# Altium PCB Terminal_Board_PCB V4.PcbDoc (part 2 of 2)
Units mm, origin at the board's own origin, x right, y up, seen from the top; angles counter-clockwise.
Board outline 240.8 x 116.8 mm, 2 copper layers (Top Layer, Bottom Layer 1), stack 0.444 mm thick; 18 components, 37 nets, 96 pads, 39 vias.
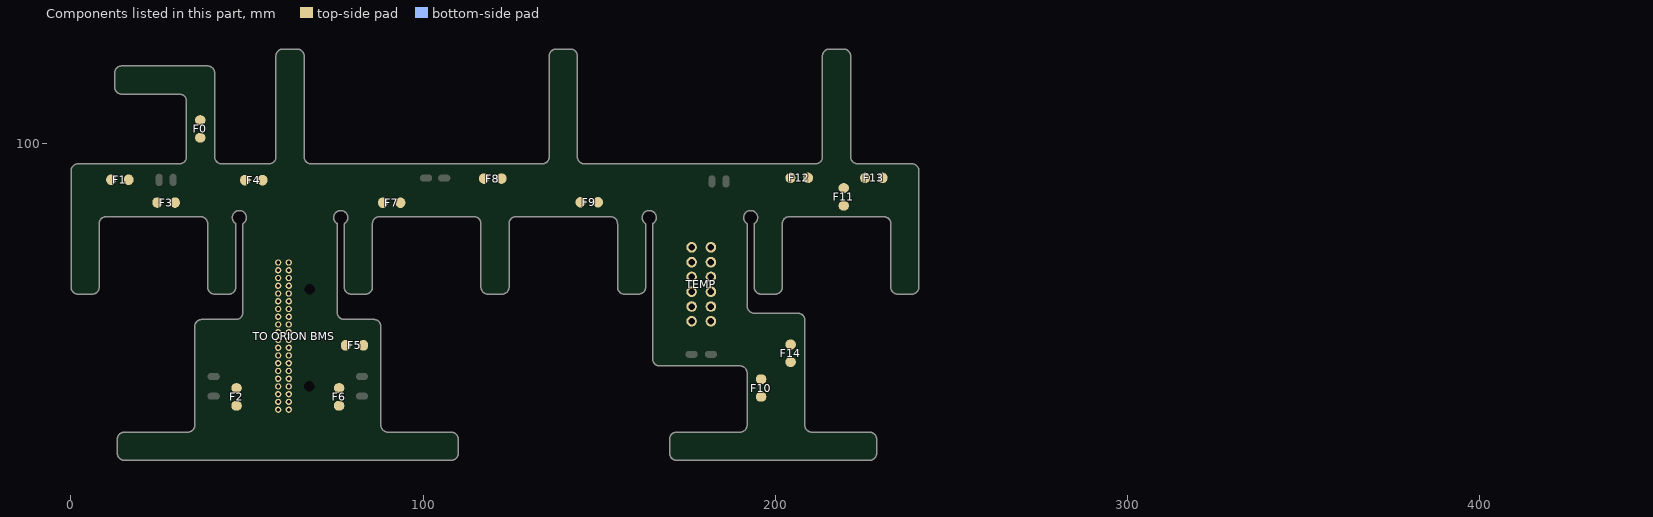
[diagram p2: the components of this part, seen from the top]

## Via types
v1: diameter 1.27, hole 0.5, Top Layer to Bottom Layer 1, 39 vias

## Nets (pads, with @x,y where several pads share a name; then routed paths per layer and width w, separated by ;. In a path a pad name is that pad's centre, name@x,y a point inside that pad or via, vN(x,y) a via of type N, cw(c..) or ccw(c..) an arc to the next point about the centre after c; other vN are vias at no path point) (continued)
copper on no net: | length 8697.1
  Top Layer w0.025: 286.048,39.172 291.168,44.293 ; 286.048,40.696 291.168,45.817 ; 286.048,42.22 291.168,47.341 ; 286.048,43.744 291.168,48.865 ; 286.048,45.268 291.169,50.389 ; 286.048,46.792 300.552,61.296 ; 286.048,48.316 299.028,61.296 ; 286.048,49.84 297.504,61.296 ; 286.048,51.364 295.98,61.296 ; 286.048,52.888 294.456,61.296 ; 286.048,54.412 292.932,61.296 ; 286.048,55.936 291.408,61.296 ; 286.048,57.46 289.884,61.296 ; 286.048,58.984 288.36,61.296 ; 286.256,60.717 286.627,61.087 ; 286.385,37.986 291.168,42.769 ; 287.497,37.573 291.168,41.245 ; 289.021,37.573 291.168,39.721 ; 292.435,51.655 302.076,61.296 ; 293.959,51.656 303.6,61.296 ; 293.978,76.059 297.01,79.091 ; 293.978,77.583 295.486,79.091 ; 294.102,74.658 298.534,79.091 ; 294.459,9.484 297.496,12.52 ; 294.459,11.008 295.972,12.52 ; 294.584,8.084 299.02,12.52 ; 294.937,73.97 300.058,79.091 ; 295.422,7.399 300.544,12.52 ; 295.483,51.656 305.124,61.296 ; 296.423,73.931 301.582,79.091 ; 296.914,7.366 302.068,12.52 ; 297.007,51.656 312.157,66.806 ; 297.947,73.931 303.106,79.091 ; 298.438,7.366 303.592,12.52 ; 298.531,51.656 312.157,65.282 ; 299.471,73.931 304.63,79.091 ; 299.962,7.366 305.116,12.52 ; 300.055,51.656 312.157,63.758 ; 300.995,73.931 306.154,79.091 ; 301.486,7.366 306.64,12.52 ; 301.579,51.656 312.198,62.275 ; 302.519,73.931 307.678,79.091 ; 303.01,7.366 334.439,38.795 ; 303.103,51.656 312.877,61.429 ; 304.043,73.931 309.202,79.091 ; 304.534,7.366 334.439,37.271 ; 304.627,51.656 314.268,61.296 ; 305.567,73.931 310.726,79.091 ; 306.058,7.366 334.439,35.747 ; 306.151,51.656 315.792,61.296 ; 306.684,73.525 311.829,78.669 ; 307.036,63.209 312.157,68.33 ; 307.036,64.733 312.157,69.854 ; 307.036,66.257 312.157,71.378 ; 307.036,67.781 312.157,72.902 ; 307.036,69.305 312.157,74.426 ; 307.036,70.829 312.157,75.95 ; 307.036,72.353 312.157,77.474 ; 307.582,7.366 334.442,34.226 ; 307.675,51.656 317.316,61.296 ; 308.541,14.422 334.439,40.319 ; 308.541,15.946 334.439,41.843 ; 308.541,17.47 334.439,43.367 ; 308.541,18.994 334.439,44.891 ; 308.541,20.518 334.439,46.415 ; 308.541,22.042 334.439,47.939 ; 308.541,23.566 334.439,49.463 ; 308.541,25.09 316.605,33.154 ; 308.541,26.614 314.931,33.004 ; 308.541,28.138 313.407,33.004 ; 308.541,29.662 311.883,33.004 ; 308.541,31.186 310.359,33.004 ; 309.106,7.366 334.983,33.243 ; 309.199,51.656 318.84,61.296 ; 310.424,51.356 320.364,61.296 ; 310.63,7.366 336.267,33.004 ; 310.883,39.624 316.004,44.745 ; 310.883,41.148 316.004,46.269 ; 310.883,42.672 316.004,47.793 ; 310.883,44.196 316.004,49.317 ; 310.883,45.72 315.768,50.604 ; 310.883,47.244 315.406,51.766 ; 310.883,48.768 328.422,66.307 ; 310.883,50.292 321.888,61.296 ; 311.03,38.246 316.004,43.221 ; 311.907,37.599 316.004,41.697 ; 312.154,7.366 337.791,33.004 ; 313.405,37.573 316.004,40.173 ; 313.678,7.366 339.315,33.004 ; 314.949,37.593 315.985,38.629 ; 315.202,7.366 340.839,33.004 ; 316.362,52.722 328.422,64.783 ; 316.726,7.366 341.992,32.632 ; 317.134,33.683 334.129,50.678 ; 317.284,35.357 333.895,51.967 ; 317.284,36.881 341.7,61.296 ; 317.284,38.405 340.176,61.296 ; 317.284,39.929 338.652,61.296 ; 317.284,41.453 337.128,61.296 ; 317.284,42.977 335.604,61.296 ; 317.284,44.501 334.08,61.296 ; 317.284,46.025 332.556,61.296 ; 317.284,47.549 331.032,61.296 ; 317.284,49.073 329.524,61.313 ; 317.543,52.38 328.422,63.259 ; 317.866,51.178 328.608,61.921 ; 318.25,7.366 342.37,31.486 ; 319.205,14.595 320.742,13.057 ; 319.205,16.119 322.266,13.057 ; 319.205,17.643 323.79,13.057 ; 319.205,19.167 325.314,13.057 ; 319.205,20.691 326.838,13.057 ; 319.205,22.215 328.362,13.057 ; 319.205,23.739 329.886,13.057 ; 319.205,25.263 331.41,13.057 ; 319.205,26.787 332.519,13.472 ; 319.205,28.311 332.519,14.996 ; 319.205,29.835 332.519,16.52 ; 319.205,31.359 332.519,18.044 ; 319.205,32.883 332.519,19.568 ; 319.205,34.407 332.519,21.092 ; 319.205,35.931 332.519,22.616 ; 319.205,37.455 332.519,24.14 ; 319.205,38.979 332.519,25.664 ; 319.205,40.503 332.519,27.188 ; 319.205,42.027 332.519,28.712 ; 319.205,43.551 332.519,30.236 ; 319.205,45.075 332.519,31.76 ; 319.205,46.599 332.519,33.284 ; 319.205,48.123 332.519,34.808 ; 319.774,7.366 342.37,29.962 ; 320.323,48.528 332.519,36.332 ; 321.298,7.366 342.37,28.438 ; 321.847,48.528 332.519,37.856 ; 322.822,7.366 342.37,26.914 ; 323.301,62.71 328.422,67.831 ; 323.301,64.234 328.422,69.355 ; 323.301,65.758 328.422,70.879 ; 323.301,67.282 328.422,72.403 ; 323.301,68.806 328.422,73.927 ; 323.301,70.33 328.422,75.451 ; 323.301,71.854 328.422,76.975 ; 323.301,73.378 328.422,78.499 ; 323.301,74.902 328.422,80.023 ; 323.301,76.426 328.302,81.427 ; 323.301,77.95 327.474,82.122 ; 323.301,79.474 325.985,82.158 ; 323.301,80.998 324.461,82.158 ; 323.371,48.528 332.519,39.38 ; 324.346,7.366 342.37,25.39 ; 324.895,48.528 332.519,40.904 ; 325.87,7.366 342.37,23.866 ; 326.419,48.528 332.519,42.428 ; 327.394,7.366 342.37,22.342 ; 327.943,48.528 332.519,43.952 ; 328.918,7.366 342.37,20.818 ; 329.467,48.528 332.519,45.476 ; 330.442,7.366 342.37,19.294 ; 330.991,48.528 332.519,47 ; 331.966,7.366 342.37,17.77 ; 333.49,7.366 342.37,16.246 ; 334.596,52.669 343.224,61.296 ; 335.014,7.366 342.37,14.722 ; 335.719,40.076 340.84,45.196 ; 335.719,41.6 340.84,46.72 ; 335.719,43.124 340.84,48.244 ; 335.719,44.648 340.84,49.768 ; 335.719,46.172 350.844,61.296 ; 335.719,47.696 349.32,61.296 ; 335.719,49.22 347.796,61.296 ; 335.748,38.581 340.84,43.672 ; 335.905,52.453 344.748,61.296 ; 336.348,51.373 346.272,61.296 ; 336.406,37.714 340.84,42.148 ; 336.538,7.366 342.476,13.305 ; 337.789,37.573 340.84,40.624 ; 338.062,7.366 343.273,12.578 ; 339.313,37.573 340.84,39.1 ; 339.586,7.366 344.74,12.52 ; 341.11,7.366 346.264,12.52 ; 342.634,7.366 347.788,12.52 ; 342.727,51.656 352.368,61.296 ; 344.158,7.366 349.312,12.52 ; 344.251,51.656 353.892,61.296 ; 345.682,7.366 350.836,12.52 ; 345.775,51.656 355.416,61.296 ; 347.206,7.366 352.36,12.52 ; 347.299,51.656 356.94,61.296 ; 348.73,7.366 353.884,12.52 ; 348.823,51.656 358.464,61.296 ; 350.254,7.366 355.39,12.502 ; 350.347,51.656 359.988,61.296 ; 351.778,7.366 356.287,11.875 ; 351.871,51.656 361.512,61.296 ; 353.302,7.366 356.452,10.517 ; 353.395,51.656 363.036,61.296 ; 354.826,7.366 356.452,8.993 ; 354.919,51.656 364.56,61.296 ; 356.443,51.656 366.084,61.296 ; 357.967,51.656 367.608,61.296 ; 359.471,51.635 369.132,61.296 ; 360.378,51.018 370.656,61.296 ; 360.555,39.004 365.676,44.124 ; 360.555,40.528 365.676,45.648 ; 360.555,42.052 365.676,47.172 ; 360.555,43.576 365.676,48.696 ; 360.555,45.1 365.676,50.22 ; 360.555,46.624 378.094,64.162 ; 360.555,48.148 378.094,65.686 ; 360.555,49.672 372.4,61.516 ; 360.977,37.901 365.676,42.6 ; 362.173,37.573 365.676,41.076 ; 363.697,37.573 365.676,39.552 ; 367.111,51.656 378.094,62.638 ; 368.635,51.656 378.565,61.585 ; 370.159,51.656 379.8,61.296 ; 371.683,51.656 381.324,61.296 ; 372.753,61.869 378.094,67.21 ; 372.973,63.613 378.094,68.734 ; 372.973,65.137 378.094,70.258 ; 372.973,66.661 378.094,71.782 ; 372.973,68.185 378.094,73.306 ; 372.973,69.709 378.094,74.83 ; 372.973,71.233 378.094,76.354 ; 372.973,72.757 378.094,77.878 ; 372.973,74.281 378.094,79.402 ; 372.973,75.805 378.094,80.926 ; 372.973,77.33 377.565,81.921 ; 372.973,78.854 376.277,82.158 ; 372.973,80.378 374.753,82.158 ; 373.207,51.656 382.848,61.296 ; 374.731,51.656 384.372,61.296 ; 376.255,51.656 385.896,61.296 ; 377.779,51.656 387.42,61.296 ; 379.303,51.656 388.944,61.296 ; 380.827,51.656 390.468,61.296 ; 382.351,51.656 391.992,61.296 ; 383.875,51.656 393.516,61.296 ; 385.016,51.272 395.04,61.296 ; 385.391,39.455 390.512,44.576 ; 385.391,40.979 390.512,46.1 ; 385.391,42.503 390.512,47.624 ; 385.391,44.027 390.512,49.148 ; 385.391,45.551 390.36,50.52 ; 385.391,47.075 389.883,51.567 ; 385.391,48.599 398.088,61.296 ; 385.391,50.123 396.564,61.296 ; 385.605,38.145 390.512,43.052 ; 386.557,37.573 390.512,41.528 ; 388.081,37.573 390.512,40.004 ; 389.689,37.657 390.428,38.396 ; 391.069,52.753 399.612,61.296 ; 391.683,83.42 394.217,85.954 ; 391.683,84.944 392.693,85.954 ; 391.683,89.516 394.217,92.05 397.265,95.098 400.313,98.146 ; 391.683,91.04 392.693,92.05 395.741,95.098 398.789,98.146 ; 391.683,92.564 394.217,95.098 397.265,98.146 ; 391.683,94.088 392.693,95.098 395.741,98.146 ; 391.683,95.612 394.217,98.146 ; 391.683,97.136 392.693,98.146 ; 391.683,104.756 394.217,107.29 ; 391.683,106.28 392.693,107.29 ; 391.792,26.044 408.947,43.199 ; 391.792,27.568 408.947,44.723 ; 391.792,29.092 408.947,46.247 ; 391.792,30.616 408.947,47.771 ; 391.792,32.14 408.947,49.295 ; 391.792,33.664 408.721,50.594 ; 391.792,35.188 408.341,51.737 ; 391.792,36.712 416.376,61.296 ; 391.792,38.236 414.852,61.296 ; 391.792,39.76 413.328,61.296 ; 391.792,41.284 411.804,61.296 ; 391.792,42.808 410.28,61.296 ; 391.792,44.332 408.756,61.296 ; 391.792,45.856 407.232,61.296 ; 391.792,47.38 405.708,61.296 ; 391.792,48.904 404.184,61.296 ; 392.135,52.296 401.136,61.296 ; 392.164,24.893 408.947,41.675 ; 392.25,50.887 402.66,61.296 ; 392.693,82.906 395.741,85.954 ; 392.693,89.002 395.741,92.05 398.789,95.098 401.837,98.146 ; 392.693,104.242 395.741,107.29 ; 393.311,24.515 408.947,40.151 ; 394.217,82.906 397.265,85.954 ; 394.217,89.002 397.265,92.05 400.313,95.098 403.361,98.146 ; 394.217,104.242 397.265,107.29 ; 394.835,24.515 408.947,38.627 ; 394.865,9.305 398.08,12.52 ; 394.865,10.829 396.556,12.52 ; 394.993,30.528 396.53,28.99 ; 394.993,32.052 398.054,28.99 ; 394.993,33.576 399.578,28.99 ; 394.993,35.1 401.102,28.99 ; 394.993,36.624 402.626,28.99 ; 394.993,38.148 404.15,28.99 ; 394.993,39.672 405.674,28.99 ; 394.993,41.196 405.746,30.442 ; 394.993,42.72 405.746,31.966 ; 394.993,44.244 405.746,33.49 ; 394.993,45.768 405.746,35.014 ; 394.993,47.292 405.746,36.538 ; 394.993,48.816 405.746,38.062 ; 395.053,7.97 399.604,12.52 ; 395.097,50.235 405.746,39.586 ; 395.741,82.906 398.789,85.954 ; 395.741,89.002 398.789,92.05 401.837,95.098 404.885,98.146 ; 395.741,104.242 398.789,107.29 ; 395.977,7.37 401.128,12.52 ; 396.359,24.515 408.947,37.103 ; 396.621,50.235 405.746,41.11 ; 397.265,82.906 400.313,85.954 ; 397.265,89.002 400.313,92.05 403.361,95.098 406.409,98.146 ; 397.265,104.242 400.313,107.29 ; 397.498,7.366 402.652,12.52 ; 397.883,24.515 408.947,35.579 ; 398.145,50.235 405.746,42.634 ; 398.789,82.906 401.837,85.954 ; 398.789,89.002 401.837,92.05 404.885,95.098 407.933,98.146 ; 398.789,104.242 401.837,107.29 ; 399.022,7.366 404.176,12.52 ; 399.407,24.515 409.376,34.485 ; 399.669,50.235 405.746,44.158 ; 400.313,82.906 403.361,85.954 ; 400.313,89.002 403.361,92.05 406.409,95.098 409.457,98.146 ; 400.313,104.242 403.361,107.29 ; 400.546,7.366 405.7,12.52 ; 400.931,24.515 410.571,34.156 ; 401.193,50.235 405.746,45.682 ; 401.837,82.906 404.885,85.954 ; 401.837,89.002 404.885,92.05 407.933,95.098 410.981,98.146 ; 401.837,104.242 404.885,107.29 ; 402.07,7.366 407.224,12.52 ; 402.455,24.515 412.095,34.156 ; 402.717,50.235 405.746,47.206 ; 403.361,82.906 406.409,85.954 ; 403.361,89.002 406.409,92.05 409.457,95.098 412.505,98.146 ; 403.361,104.242 406.409,107.29 ; 403.594,7.366 419.438,23.21 ; 403.979,24.515 413.619,34.156 ; 404.241,50.235 405.746,48.73 ; 404.885,82.906 407.933,85.954 ; 404.885,89.002 407.933,92.05 410.981,95.098 414.029,98.146 417.077,95.098 420.125,92.05 423.173,89.002 426.221,85.954 ; 404.885,104.242 407.933,107.29 ; 405.118,7.366 419.438,21.686 ; 405.503,24.515 415.143,34.156 ; 406.409,82.906 409.457,85.954 ; 406.409,89.002 409.457,92.05 412.505,95.098 414.029,96.622 415.553,95.098 418.601,92.05 421.649,89.002 424.697,85.954 ; 406.409,104.242 409.457,107.29 ; 406.642,7.366 419.438,20.162 ; 407.027,24.515 416.667,34.156 ; 407.933,82.906 410.981,85.954 ; 407.933,89.002 410.981,92.05 414.029,95.098 417.077,92.05 420.125,89.002 423.173,85.954 ; 407.933,104.242 410.981,107.29 ; 408.166,7.366 419.438,18.638 ; 408.348,24.312 418.191,34.156 ; 408.937,23.378 419.192,33.632 ; 408.947,14.243 419.438,24.734 ; 408.947,15.767 419.438,26.258 ; 408.947,17.291 419.438,27.782 ; 408.947,18.815 419.438,29.306 ; 408.947,20.339 419.438,30.83 ; 408.947,21.863 419.438,32.354 ; 409.334,52.73 417.9,61.296 ; 409.457,82.906 412.505,85.954 ; 409.457,89.002 412.505,92.05 414.029,93.574 415.553,92.05 418.601,89.002 421.649,85.954 ; 409.457,104.242 412.505,107.29 ; 409.69,7.366 419.438,17.114 ; 410.227,39.907 415.348,45.028 ; 410.227,41.431 415.348,46.552 ; 410.227,42.955 415.348,48.076 ; 410.227,44.479 415.348,49.6 ; 410.227,46.003 427.766,63.542 ; 410.227,47.527 427.766,65.066 ; 410.227,49.051 427.766,66.59 ; 410.29,38.446 415.348,43.504 ; 410.497,52.369 419.424,61.296 ; 410.801,51.149 420.948,61.296 ; 410.981,82.906 414.029,85.954 ; 410.981,89.002 414.029,92.05 417.077,89.002 420.125,85.954 ; 410.981,104.242 414.029,107.29 ; 411.032,37.665 415.348,41.98 ; 411.214,7.366 419.438,15.59 ; 412.465,37.573 415.348,40.456 ; 412.505,82.906 414.029,84.43 ; 412.505,89.002 414.029,90.526 415.553,89.002 418.601,85.954 ; 412.505,104.242 414.029,105.766 ; 412.738,7.366 419.438,14.066 ; 413.989,37.573 415.348,38.932 ; 414.029,87.478 415.553,85.954 ; 414.029,89.002 417.077,85.954 ; 414.029,99.67 415.553,98.146 418.601,95.098 421.649,92.05 424.697,89.002 427.745,85.954 ; 414.029,101.194 417.077,98.146 420.125,95.098 423.173,92.05 426.221,89.002 429.269,85.954 ; 414.029,102.718 415.553,101.194 418.601,98.146 421.649,95.098 424.697,92.05 427.745,89.002 430.793,85.954 ; 414.029,104.242 417.077,101.194 420.125,98.146 423.173,95.098 426.221,92.05 429.269,89.002 432.317,85.954 ; 414.262,7.366 419.806,12.911 ; 415.553,104.242 418.601,101.194 421.649,98.146 424.697,95.098 427.745,92.05 430.793,89.002 433.841,85.954 ; 415.786,7.366 420.94,12.52 ; 417.077,104.242 420.125,101.194 423.173,98.146 426.221,95.098 429.269,92.05 432.317,89.002 435.365,85.954 ; 417.31,7.366 422.464,12.52 ; 417.403,51.656 427.859,62.112 ; 418.601,104.242 421.649,101.194 424.697,98.146 427.745,95.098 430.793,92.05 433.841,89.002 436.889,85.954 ; 418.834,7.366 423.988,12.52 ; 418.927,51.656 428.638,61.366 ; 420.125,104.242 423.173,101.194 426.221,98.146 429.269,95.098 432.317,92.05 435.365,89.002 438.413,85.954 ; 420.358,7.366 425.512,12.52 ; 420.451,51.656 430.092,61.296 ; 421.649,104.242 424.697,101.194 427.745,98.146 430.793,95.098 433.841,92.05 436.889,89.002 439.937,85.954 ; 421.882,7.366 427.036,12.52 ; 421.975,51.656 431.616,61.296 ; 422.645,62.993 427.766,68.114 ; 422.645,64.517 427.766,69.638 ; 422.645,66.041 427.766,71.162 ; 422.645,67.565 427.766,72.686 ; 422.645,69.089 427.766,74.21 ; 422.645,70.613 427.766,75.734 ; 422.645,72.137 427.766,77.258 ; 422.645,73.661 427.766,78.782 ; 422.645,75.185 427.766,80.306 ; 422.645,76.709 427.545,81.609 ; 422.645,78.233 426.569,82.158 ; 422.645,79.757 425.045,82.158 ; 422.747,81.383 423.425,82.062 ; 423.173,104.242 426.221,101.194 429.269,98.146 432.317,95.098 435.365,92.05 438.413,89.002 440.184,87.231 ; 423.406,7.366 428.56,12.52 ; 423.499,51.656 433.14,61.296 ; 424.697,104.242 427.745,101.194 430.793,98.146 433.841,95.098 436.889,92.05 439.937,89.002 440.184,88.755 ; 424.93,7.366 430.084,12.52 ; 425.023,51.656 434.664,61.296 ; 426.221,104.242 429.269,101.194 432.317,98.146 435.365,95.098 438.413,92.05 440.184,90.279 ; 426.454,7.366 431.564,12.476 ; 426.547,51.656 436.188,61.296 ; 427.745,104.242 430.793,101.194 433.841,98.146 436.889,95.098 439.937,92.05 440.184,91.803 ; 427.978,7.366 432.382,11.77 ; 428.071,51.656 437.712,61.296 ; 429.269,104.242 432.317,101.194 435.365,98.146 438.413,95.098 440.184,93.327 ; 429.502,7.366 432.496,10.36 ; 429.595,51.656 439.201,61.262 ; 430.793,104.242 433.841,101.194 436.889,98.146 439.937,95.098 440.184,94.851 ; 431.026,7.366 432.496,8.836 ; 431.119,51.656 440.052,60.588 ; 432.317,104.242 435.365,101.194 438.413,98.146 440.184,96.375 ; 432.643,51.656 440.184,59.196 ; 433.841,104.242 436.889,101.194 439.937,98.146 440.184,97.899 ; 434.119,51.607 440.184,57.672 ; 434.942,50.906 440.184,56.148 ; 435.063,38.835 440.184,43.956 ; 435.063,40.359 440.184,45.48 ; 435.063,41.883 440.184,47.004 ; 435.063,43.407 440.184,48.528 ; 435.063,44.931 440.184,50.052 ; 435.063,46.455 440.184,51.576 ; 435.063,47.979 440.184,53.1 ; 435.063,49.503 440.184,54.624 ; 435.365,104.242 438.413,101.194 440.184,99.423 ; 435.577,37.826 440.184,42.432 ; 436.849,37.573 440.184,40.908 ; 436.889,104.242 439.937,101.194 440.184,100.947 ; 438.373,37.573 440.184,39.384 ; 438.413,104.242 440.184,102.471 ; 439.937,104.242 440.184,103.995
  Top Layer w0.381: 286.048,85.954 296.459,85.954 346.482,85.954 360.703,85.954 377.209,85.954 391.683,85.954 414.029,85.954 440.184,85.954 ; 286.048,89.002 296.459,89.002 346.482,89.002 360.703,89.002 377.209,89.002 391.683,89.002 414.029,89.002 440.184,89.002 ; 286.048,92.05 296.459,92.05 346.482,92.05 360.703,92.05 377.209,92.05 391.683,92.05 414.029,92.05 440.184,92.05 ; 286.048,95.098 296.459,95.098 346.482,95.098 360.703,95.098 377.209,95.098 391.683,95.098 414.029,95.098 440.184,95.098 ; 286.048,98.146 296.459,98.146 346.482,98.146 360.703,98.146 377.209,98.146 391.683,98.146 414.029,98.146 440.184,98.146 ; 286.048,101.194 296.459,101.194 346.482,101.194 360.703,101.194 377.209,101.194 391.683,101.194 414.029,101.194 440.184,101.194 ; 286.048,104.242 296.459,104.242 346.482,104.242 360.703,104.242 377.209,104.242 391.683,104.242 414.029,104.242 440.184,104.242 ; 286.048,107.29 440.184,107.29 ; 296.459,110.338 296.459,82.906 ; 346.482,110.338 346.482,82.906 ; 360.703,110.338 360.703,82.906 ; 377.209,110.338 377.209,82.906 ; 391.683,110.338 391.683,82.906 ; 414.029,110.338 414.029,82.906 ; 296.459,82.906 346.482,82.906 ; 296.459,82.906 286.048,82.906 286.048,110.338 440.184,110.338 440.184,82.906 414.029,82.906 ; 346.482,82.906 360.703,82.906 ; 360.703,82.906 377.209,82.906 ; 377.209,82.906 391.683,82.906 ; 391.683,82.906 414.029,82.906 ; 286.048,38.873 ccw(c287.328,38.873) 287.328,37.593 289.888,37.593 ccw(c289.888,38.873) 290.793,37.968 ccw(c289.888,38.873) 291.168,38.873 291.168,50.395 cw(c292.449,50.395) 292.449,51.675 309.603,51.675 cw(c309.603,50.395) 310.883,50.395 310.883,38.873 ccw(c312.164,38.873) 311.258,37.968 ccw(c312.164,38.873) 312.164,37.593 314.724,37.593 ccw(c314.724,38.873) 316.004,38.873 316.004,50.395 cw(c316.644,51.503) 317.284,50.395 317.284,42.33 317.284,34.264 cw(c316.004,34.264) 316.004,32.984 309.822,32.984 ccw(c309.822,31.704) 308.541,31.704 308.541,13.781 cw(c307.261,13.781) 308.166,12.876 cw(c307.261,13.781) 307.261,12.501 295.739,12.501 ccw(c295.739,11.221) 294.459,11.221 294.459,8.66 ccw(c295.739,8.66) 295.739,7.38 355.172,7.38 ccw(c355.172,8.66) 356.452,8.66 356.452,11.221 ccw(c355.172,11.221) 355.172,12.501 343.65,12.501 cw(c343.65,13.781) 342.37,13.781 342.37,31.704 ccw(c341.09,31.704) 341.09,32.984 335.719,32.984 cw(c335.719,34.264) 334.439,34.264 334.439,42.33 334.439,50.395 cw(c335.079,51.503) 335.719,50.395 335.719,38.873 ccw(c337,38.873) 337,37.593 339.56,37.593 ccw(c339.56,38.873) 340.465,37.968 ccw(c339.56,38.873) 340.84,38.873 340.84,50.395 cw(c342.12,50.395) 342.12,51.675 359.275,51.675 cw(c359.275,50.395) 360.555,50.395 360.555,38.873 ccw(c361.835,38.873) 360.93,37.968 ccw(c361.835,38.873) 361.835,37.593 364.396,37.593 ccw(c364.396,38.873) 365.676,38.873 365.676,50.395 cw(c366.956,50.395) 366.956,51.675 384.111,51.675 cw(c384.111,50.395) 385.391,50.395 385.391,38.873 ccw(c386.671,38.873) 386.671,37.593 389.232,37.593 ccw(c389.232,38.873) 390.512,38.873 390.512,50.395 cw(c391.152,51.503) 391.792,50.395 391.792,25.815 ccw(c393.072,25.815) 393.072,24.535 407.667,24.535 cw(c407.667,23.255) 408.947,23.255 408.947,18.518 408.947,13.781 cw(c407.667,13.781) 408.572,12.876 cw(c407.667,13.781) 407.667,12.501 396.145,12.501 ccw(c396.145,11.221) 394.865,11.221 394.865,9.94 394.865,8.66 ccw(c396.145,8.66) 395.24,7.755 ccw(c396.145,8.66) 396.145,7.38 431.216,7.38 ccw(c431.216,8.66) 432.121,7.755 ccw(c431.216,8.66) 432.496,8.66 432.496,9.94 432.496,11.221 ccw(c431.216,11.221) 431.216,12.501 420.718,12.501 cw(c420.718,13.781) 419.438,13.781 419.438,32.856 ccw(c418.158,32.856) 419.063,33.761 ccw(c418.158,32.856) 418.158,34.136 410.227,34.136 cw(c410.227,35.416) 408.947,35.416 408.947,50.395 cw(c409.587,51.503) 410.227,50.395 410.227,38.873 ccw(c411.507,38.873) 410.602,37.968 ccw(c411.507,38.873) 411.507,37.593 414.068,37.593 ccw(c414.068,38.873) 415.348,38.873 415.348,50.395 cw(c416.628,50.395) 415.86,51.419 cw(c416.628,50.395) 416.628,51.675 433.783,51.675 cw(c433.783,50.395) 435.063,50.395 435.063,38.873 ccw(c436.343,38.873) 436.343,37.593 438.903,37.593 ccw(c438.903,38.873) 440.184,38.873 440.184,59.996 ccw(c438.903,59.996) 439.809,60.902 ccw(c438.903,59.996) 438.904,61.277 429.046,61.277 cw(c429.046,62.557) 427.766,62.557 427.766,80.864 ccw(c426.485,80.864) 427.594,81.504 ccw(c426.486,80.864) 426.486,82.144 425.205,82.144 423.925,82.144 ccw(c423.925,80.864) 422.645,80.864 422.645,62.557 cw(c421.365,62.557) 421.365,61.277 400.369,61.277 379.374,61.277 cw(c379.374,62.557) 378.094,62.557 378.094,80.864 ccw(c376.814,80.864) 377.719,81.769 ccw(c376.814,80.864) 376.814,82.144 375.534,82.144 374.253,82.144 ccw(c374.253,80.864) 372.973,80.864 372.973,62.557 cw(c371.693,62.557) 371.693,61.277 350.698,61.277 329.702,61.277 cw(c329.702,62.557) 328.422,62.557 328.422,80.864 ccw(c327.142,80.864) 328.047,81.769 ccw(c327.142,80.864) 327.142,82.144 325.862,82.144 324.582,82.144 ccw(c324.582,80.864) 323.676,81.769 ccw(c324.582,80.864) 323.301,80.864 323.301,62.557 cw(c322.021,62.557) 322.021,61.277 317.729,61.277 313.437,61.277 cw(c313.437,62.557) 312.157,62.557 312.157,77.791 ccw(c310.877,77.791) 310.877,79.071 295.259,79.071 ccw(c295.259,77.791) 293.978,77.791 293.978,75.231 ccw(c295.259,75.231) 295.259,73.95 305.756,73.95 cw(c305.756,72.67) 307.036,72.67 307.036,62.557 cw(c305.756,62.557) 305.756,61.277 287.328,61.277 ccw(c287.328,59.996) 286.048,59.996 286.048,38.873 ; 319.205,13.071 332.519,13.071 332.519,48.514 319.205,48.514 319.205,13.071 ; 394.993,29.004 394.993,50.221 405.746,50.221 405.746,29.004 394.993,29.004

## Polygon pours and split planes (outlines as drawn)
no net on Layer0 "Default Coverlay 1 Top" (split plane): 788 vertices, not listed, extent 0.013,9.893 240.813,126.693
no net on Layer0 "Default Coverlay 1 Bottom" (split plane): 788 vertices, not listed, extent 0.013,9.893 240.813,126.693

## Other copper
Top Layer:
  text "Layer" at 287.826,108.052 h1.52
  text "Name" at 298.237,108.052 h1.52
  text "Material" at 348.26,108.052 h1.52
  text "Thickness" at 362.481,108.052 h1.52
  text "Constant" at 378.987,108.052 h1.52
  text "Main Flex PCB" at 393.461,108.052 h1.52
  text "Header Stiffener" at 415.807,108.052 h1.52
  text "Main Flex PCB Top Coverlay" at 298.237,105.004 h1.52
  text "FHK" at 348.26,105.004 h1.52
  text "1.97mil" at 362.481,105.004 h1.52
  text "3.9" at 378.987,105.004 h1.52
  text "Stiffener" at 298.237,101.956 h1.52
  text "MHK" at 348.26,101.956 h1.52
  text "9.00mil" at 362.481,101.956 h1.52
  text "3.6" at 378.987,101.956 h1.52
  text "Header Stiffener Top Coverlay" at 298.237,98.908 h1.52
  text "FHK" at 348.26,98.908 h1.52
  text "1.97mil" at 362.481,98.908 h1.52
  text "3.6" at 378.987,98.908 h1.52
  text "1" at 287.826,95.86 h1.52
  text "Top Layer" at 298.237,95.86 h1.52
  text "R-F775" at 348.26,95.86 h1.52
  text "2.76mil" at 362.481,95.86 h1.52
  text "Dielectric 1" at 298.237,92.812 h1.52
  text "R-F775" at 348.26,92.812 h1.52
  text "2.95mil" at 362.481,92.812 h1.52
  text "3.2" at 378.987,92.812 h1.52
  text "2" at 287.826,89.764 h1.52
  text "Bottom Layer 1" at 298.237,89.764 h1.52
  text "R-F775" at 348.26,89.764 h1.52
  text "2.76mil" at 362.481,89.764 h1.52
  text "Header Stiffener Bottom Coverlay" at 298.237,86.716 h1.52
  text "FHK" at 348.26,86.716 h1.52
  text "1.97mil" at 362.481,86.716 h1.52
  text "3.6" at 378.987,86.716 h1.52
  text "Main Flex PCB Bottom Coverlay" at 298.237,83.668 h1.52
  text "FHK" at 348.26,83.668 h1.52
  text "1.97mil" at 362.481,83.668 h1.52
  text "3.9" at 378.987,83.668 h1.52

## Silkscreen, mask and mechanical layers (free items; w line width, h text height)
Top Overlay:
  circle w0.127: c68.045,81.553 r0.152
  circle w0.508: c68.045,80.017 r0.051
  circle w0.127: c129.87,87.528 r0.152
  circle w0.508: c129.87,85.992 r0.051
  circle w0.508: c4.115,80.811 r0.051
  circle w0.127: c4.115,82.347 r0.152
  circle w0.508: c233.045,82.767 r0.051
  circle w0.127: c233.045,84.303 r0.152
  circle w0.508: c40.894,43.27 r0.051
  circle w0.127: c40.894,44.806 r0.152
  lines w0.254: 4.115,82.601 4.115,81.311 ; 40.894,45.06 40.894,43.77 ; 68.045,81.807 68.045,80.517 ; 129.87,87.782 129.87,86.492 ; 233.045,84.557 233.045,83.267 ; 4.115,81.311 3.802,82.601 4.428,82.601 4.115,81.311 ; 40.894,43.77 40.581,45.06 41.207,45.06 40.894,43.77 ; 68.045,80.517 68.358,81.807 67.732,81.807 68.045,80.517 ; 129.87,86.492 130.183,87.782 129.557,87.782 129.87,86.492 ; 233.045,83.267 232.732,84.557 233.358,84.557 233.045,83.267
  lines w0.762: 1.575,80.061 6.655,80.061 4.115,84.46 1.575,80.061 ; 38.354,42.52 43.434,42.52 40.894,46.919 38.354,42.52 ; 65.505,79.267 68.045,83.666 70.585,79.267 65.505,79.267 ; 127.33,85.242 129.87,89.641 132.41,85.242 127.33,85.242 ; 230.505,82.017 235.585,82.017 233.045,86.416 230.505,82.017
  text "T1+" at 31.179,90.477 h1
  text "T-" at 21.643,90.096 h1
  text "T-" at 108.282,89.994 h1
  text "T5+" at 174.932,89.842 h1
  text "T-" at 188.407,88.94 h1
  text "T3+" at 95.659,88.293 h1
  text "HV" at 128.571,82.905 h1.52
  text "HV" at 231.746,79.68 h1.52
  text "HV" at 2.816,77.673 h1.52
  text "HV" at 66.746,76.93 h1.52
  text "HV" at 39.544,40.132 h1.52
  text "T-" at 184.254,39.601 h1
  text "T6+" at 170.97,39.499 h1
  text "T-" at 82.235,35.473 h1
  text "T-" at 37.645,35.359 h1
  text "T2+" at 40.058,25.072 h1
  text "T4+" at 81.6,24.932 h1
  text "Pheonix Accumulator" at 194.107,15.586 h1.52
  text "Terminal Board" at 195.91,14.138 h1.52
  text "B. Reed" at 198.138,12.792 h1.52
Mechanical 1:
  circle w0.013: c224.803,13.893 r1.6
  circle w0.013: c174.013,13.893 r1.6
  circle w0.013: c106.003,13.893 r1.6
  circle w0.013: c17.154,13.893 r1.6
  circle w0.013: c217.413,122.693 r1.6
  circle w0.013: c139.813,122.693 r1.6
  circle w0.013: c16.403,117.893 r1.6
  circle w0.013: c62.213,122.693 r1.6
  circle w0.013: c236.813,61.093 r1.6
  circle w0.013: c198.013,61.093 r1.6
  circle w0.013: c159.213,61.093 r1.6
  circle w0.013: c120.413,61.093 r1.6
  circle w0.013: c81.613,61.093 r1.6
  circle w0.013: c42.813,61.093 r1.6
  circle w0.013: c4.013,61.093 r1.6
  lines w0.013: 68.213,94.093 cw(c68.213,96.093) 66.213,96.093 66.213,124.693 ccw(c64.213,124.693) 64.213,126.693 60.213,126.693 ccw(c60.213,124.693) 58.213,124.693 58.213,96.093 cw(c56.213,96.093) 56.213,94.093 42.803,94.093 cw(c42.803,96.093) 40.803,96.093 40.803,119.893 ccw(c38.803,119.893) 38.803,121.893 14.403,121.893 ccw(c14.403,119.893) 12.403,119.893 12.403,115.893 ccw(c14.403,115.893) 14.403,113.893 30.803,113.893 cw(c30.803,111.893) 32.803,111.893 32.803,96.093 cw(c30.803,96.093) 30.803,94.093 2.013,94.093 ccw(c2.013,92.093) 0.013,92.093 0.013,59.093 ccw(c2.013,59.093) 2.013,57.093 6.013,57.093 ccw(c6.013,59.093) 8.013,59.093 8.013,77.093 cw(c10.013,77.093) 10.013,79.093 36.813,79.093 cw(c36.813,77.093) 38.813,77.093 38.813,59.093 ccw(c40.813,59.093) 40.813,57.093 44.813,57.093 ccw(c44.813,59.093) 46.813,59.093 46.813,77.093 cw(c47.813,78.825) 48.813,77.093 48.813,51.893 cw(c46.813,51.893) 46.813,49.893 37.154,49.893 ccw(c37.154,47.893) 35.154,47.893 35.154,19.893 cw(c33.154,19.893) 33.154,17.893 15.154,17.893 ccw(c15.154,15.893) 13.154,15.893 13.154,11.893 ccw(c15.154,11.893) 15.154,9.893 108.003,9.893 ccw(c108.003,11.893) 110.003,11.893 110.003,15.893 ccw(c108.003,15.893) 108.003,17.893 90.003,17.893 cw(c90.003,19.893) 88.003,19.893 88.003,47.893 ccw(c86.003,47.893) 86.003,49.893 77.613,49.893 cw(c77.613,51.893) 75.613,51.893 75.613,77.093 cw(c76.613,78.825) 77.613,77.093 77.613,59.093 ccw(c79.613,59.093) 79.613,57.093 83.613,57.093 ccw(c83.613,59.093) 85.613,59.093 85.613,77.093 cw(c87.613,77.093) 87.613,79.093 ; 114.413,79.093 cw(c114.413,77.093) 116.413,77.093 116.413,59.093 ccw(c118.413,59.093) 118.413,57.093 122.413,57.093 ccw(c122.413,59.093) 124.413,59.093 124.413,77.093 ; 126.413,79.093 153.213,79.093 cw(c153.213,77.093) 155.213,77.093 155.213,59.093 ccw(c157.213,59.093) 157.213,57.093 161.213,57.093 ccw(c161.213,59.093) 163.213,59.093 163.213,77.093 cw(c164.213,78.825) 165.213,77.093 165.213,38.693 ccw(c167.213,38.693) 167.213,36.693 190.013,36.693 cw(c190.013,34.693) 192.013,34.693 192.013,19.893 cw(c190.013,19.893) 190.013,17.893 172.013,17.893 ccw(c172.013,15.893) 170.013,15.893 170.013,11.893 ccw(c172.013,11.893) 172.013,9.893 226.803,9.893 ccw(c226.803,11.893) 228.803,11.893 228.803,15.893 ccw(c226.803,15.893) 226.803,17.893 210.403,17.893 cw(c210.403,19.893) 208.403,19.893 208.403,49.693 ccw(c206.403,49.693) 206.403,51.693 194.013,51.693 cw(c194.013,53.693) 192.013,53.693 192.013,77.093 cw(c193.013,78.825) 194.013,77.093 194.013,59.093 ccw(c196.013,59.093) 196.013,57.093 200.013,57.093 ccw(c200.013,59.093) 202.013,59.093 202.013,77.093 cw(c204.013,77.093) 204.013,79.093 230.813,79.093 cw(c230.813,77.093) 232.813,77.093 232.813,59.093 ccw(c234.813,59.093) 234.813,57.093 238.813,57.093 ccw(c238.813,59.093) 240.813,59.093 240.813,92.093 ccw(c238.813,92.093) 238.813,94.093 223.413,94.093 cw(c223.413,96.093) 221.413,96.093 221.413,124.693 ccw(c219.413,124.693) 219.413,126.693 215.413,126.693 ccw(c215.413,124.693) 213.413,124.693 213.413,96.093 cw(c211.413,96.093) 211.413,94.093 145.813,94.093 cw(c145.813,96.093) 143.813,96.093 143.813,124.693 ccw(c141.813,124.693) 141.813,126.693 137.813,126.693 ccw(c137.813,124.693) 135.813,124.693 135.813,96.093
Drill Drawing:
  circle w0.254: c0.18,171.362 r0.847
  lines w0.254: -0.667,160.778 1.027,160.778 0.18,159.085 -0.667,160.778 ; -0.667,163.318 -0.243,163.318 0.18,162.895 0.603,163.318 1.027,163.318 0.603,163.742 1.027,164.165 0.603,164.165 0.18,164.588 -0.243,164.165 -0.667,164.165 -0.243,163.742 -0.667,163.318 ; -0.667,166.705 1.027,166.705 1.027,168.398 -0.667,168.398 -0.667,166.705
  lines w0.381: -2.185,157.942 267.843,157.942 ; -2.185,173.182 267.843,173.182 ; 11.807,154.132 11.807,176.992 ; 25.519,154.132 25.519,176.992 ; 54.467,154.132 54.467,176.992 ; 67.316,154.132 67.316,176.992 ; 85.955,154.132 85.955,176.992 ; 126.836,154.132 126.836,176.992 ; 141.819,154.132 141.819,176.992 ; 160.762,154.132 160.762,176.992 ; 177.268,154.132 177.268,176.992 ; 198.953,154.132 198.953,176.992 ; 232.827,154.132 232.827,176.992 ; -2.185,154.132 267.843,154.132 267.843,176.992 -2.185,176.992 -2.185,154.132
  text "Symbol" at 0.101,174.325 h1.83
  text "Count" at 12.95,174.325 h1.83
  text "Hole Size" at 26.662,174.325 h1.83
  text "Plated" at 55.61,174.325 h1.83
  text "Hole Type" at 68.459,174.325 h1.83
  text "Drill Layer Pair" at 87.098,174.325 h1.83
  text "Via/Pad" at 127.979,174.325 h1.83
  text "Pad Shape" at 142.962,174.325 h1.83
  text "Template" at 161.905,174.325 h1.83
  text "Description" at 178.411,174.325 h1.83
  text "Hole Tolerance (+)" at 200.096,174.325 h1.83
  text "Hole Tolerance (-)" at 233.97,174.325 h1.83
  text "2" at 12.95,170.515 h1.52
  text "114.49mil (2.908mm)" at 26.662,170.515 h1.52
  text "NPTH" at 55.61,170.515 h1.52
  text "Round" at 68.459,170.515 h1.52
  text "Top Layer - Bottom Layer 1" at 87.098,170.515 h1.52
  text "Pad" at 127.979,170.515 h1.52
  text "Rounded" at 142.962,170.515 h1.52
  text "c0hn291" at 161.905,170.515 h1.52
  text "NOTES:" at 293.379,167.554 h1.52
  text "12" at 12.95,166.705 h1.52
  text "72.84mil (1.850mm)" at 26.662,166.705 h1.52
  text "PTH" at 55.61,166.705 h1.52
  text "Round" at 68.459,166.705 h1.52
  text "Top Layer - Bottom Layer 1" at 87.098,166.705 h1.52
  text "Pad" at 127.979,166.705 h1.52
  text "Rounded" at 142.962,166.705 h1.52
  text "c300h185" at 161.905,166.705 h1.52
  text "QUANTITY: 5" at 293.379,163.993 h1.52
  text "39" at 12.95,162.895 h1.52
  text "19.69mil (0.500mm)" at 26.662,162.895 h1.52
  text "PTH" at 55.61,162.895 h1.52
  text "Round" at 68.459,162.895 h1.52
  text "Top Layer - Bottom Layer 1" at 87.098,162.895 h1.52
  text "Via" at 127.979,162.895 h1.52
  text "Rounded" at 142.962,162.895 h1.52
  text "v127h50" at 161.905,162.895 h1.52
  text "BOARD SHAPE DIMENSION UNITS: mm" at 293.379,160.432 h1.52
  text "40" at 12.95,159.085 h1.52
  text "40.00mil (1.016mm)" at 26.662,159.085 h1.52
  text "PTH" at 55.61,159.085 h1.52
  text "Round" at 68.459,159.085 h1.52
  text "Top Layer - Bottom Layer 1" at 87.098,159.085 h1.52
  text "Pad" at 127.979,159.085 h1.52
  text "Rounded" at 142.962,159.085 h1.52
  text "c178h102" at 161.905,159.085 h1.52
  text "LAYERS: 2 - FCCL (Adhesiveless) (Panasonic R-F775 3 mil PI 2oz)" at 293.379,156.871 h1.52
  text "93 Total" at 12.95,155.275 h1.52
  text "LAYER WEIGHT: 2 oz" at 293.379,153.31 h1.52
  text "STIFFENERS: 2 (9 mil PI Stiffener)" at 293.379,149.749 h1.52
  text "COVERLAY: TAIFLEX FHK 1025 (Red if possible)" at 293.379,145.68 h1.52
  text "SILKSCREEN: WHITE" at 293.379,142.119 h1.52
  text "BOARD FUNCTION: To tap into battery cell voltages and connect to temperature sensors" at 293.379,138.05 h1.52
  text "Each voltage tap contact will be held down to copper busbars using short M3 screws" at 293.379,133.981 h1.52

## Dimensions
153.213,79.093 to 166.952,36.693 on Drill Drawing
167.213,36.693 to 172.013,17.893 on Drill Drawing
206.403,51.693 to 210.403,17.893 on Drill Drawing
226.803,17.893 to 226.803,9.893 on Drill Drawing
172.013,17.893 to 172.013,9.893 on Drill Drawing
75.613,51.893 to 88.003,47.893 on Drill Drawing
48.813,51.893 to 35.154,47.893 on Drill Drawing
15.154,17.893 to 15.154,9.893 on Drill Drawing
108.003,17.893 to 108.003,9.893 on Drill Drawing
230.813,79.093 to 2.013,57.093 on Drill Drawing
17.154,12.293 to 15.154,9.893 on Drill Drawing
13.154,15.893 to 15.554,13.893 on Drill Drawing
14.403,121.893 to 2.013,94.093 on Drill Drawing
238.813,94.093 to 64.213,126.693 on Drill Drawing
238.813,94.093 to 230.813,79.093 on Drill Drawing
14.403,121.893 to 14.403,113.893 on Drill Drawing
48.813,77.093 to 75.613,77.093 on Drill Drawing
4.013,61.093 to 10.55,60.975 on Drill Drawing
12.403,119.893 to 40.803,119.893 on Drill Drawing
208.403,19.893 to 228.803,11.893 on Drill Drawing
170.013,15.893 to 192.013,19.893 on Drill Drawing
165.213,38.693 to 192.013,53.693 on Drill Drawing
192.013,19.893 to 208.403,19.893 on Drill Drawing
202.013,77.093 to 232.813,77.093 on Drill Drawing
192.013,77.093 to 194.013,77.093 on Drill Drawing
163.213,77.093 to 165.213,77.093 on Drill Drawing
124.413,77.093 to 155.213,77.093 on Drill Drawing
85.613,77.093 to 116.413,77.093 on Drill Drawing
75.613,77.093 to 77.613,77.093 on Drill Drawing
46.813,77.093 to 48.813,77.093 on Drill Drawing
8.013,77.093 to 38.813,77.093 on Drill Drawing
232.813,77.093 to 240.813,59.093 on Drill Drawing
194.013,77.093 to 202.013,77.093 on Drill Drawing
155.213,77.093 to 163.213,77.093 on Drill Drawing
116.413,77.093 to 124.413,77.093 on Drill Drawing
77.613,77.093 to 85.613,77.093 on Drill Drawing
38.813,77.093 to 46.813,77.093 on Drill Drawing
0.013,92.093 to 8.013,77.093 on Drill Drawing
35.154,19.893 to 88.003,19.893 on Drill Drawing
143.813,96.093 to 213.413,96.093 on Drill Drawing
66.213,96.093 to 135.813,96.093 on Drill Drawing
40.803,96.093 to 58.213,96.093 on Drill Drawing
0.013,92.093 to 32.803,96.093 on Drill Drawing
213.413,96.093 to 221.413,96.093 on Drill Drawing
135.813,96.093 to 143.813,96.093 on Drill Drawing
58.213,96.093 to 66.213,96.093 on Drill Drawing
32.803,96.093 to 40.803,96.093 on Drill Drawing
0.013,92.093 to 240.813,92.093 on Drill Drawing
110.003,15.893 to 88.003,19.893 on Drill Drawing
13.154,15.893 to 35.154,19.893 on Drill Drawing
15.154,15.893 to 10.084,19.101 on Drill Drawing
37.154,47.893 to 27.991,50.648 on Drill Drawing
76.613,78.825 to 97.587,75.336 on Drill Drawing
47.813,78.825 to 34.341,76.2 on Drill Drawing